# Altium PCB SD171-5.0PCB2.PcbDoc (part 4 of 5)
Units mm, origin at the board's own origin, x right, y up, seen from the top; angles counter-clockwise.
Board outline 152.27 x 99.6 mm, 6 copper layers (Top Layer, InternalPlane1, Mid-Layer 1, Mid-Layer 2, InternalPlane2, Bottom Layer); 325 components, 250 nets, 1794 pads, 490 vias.
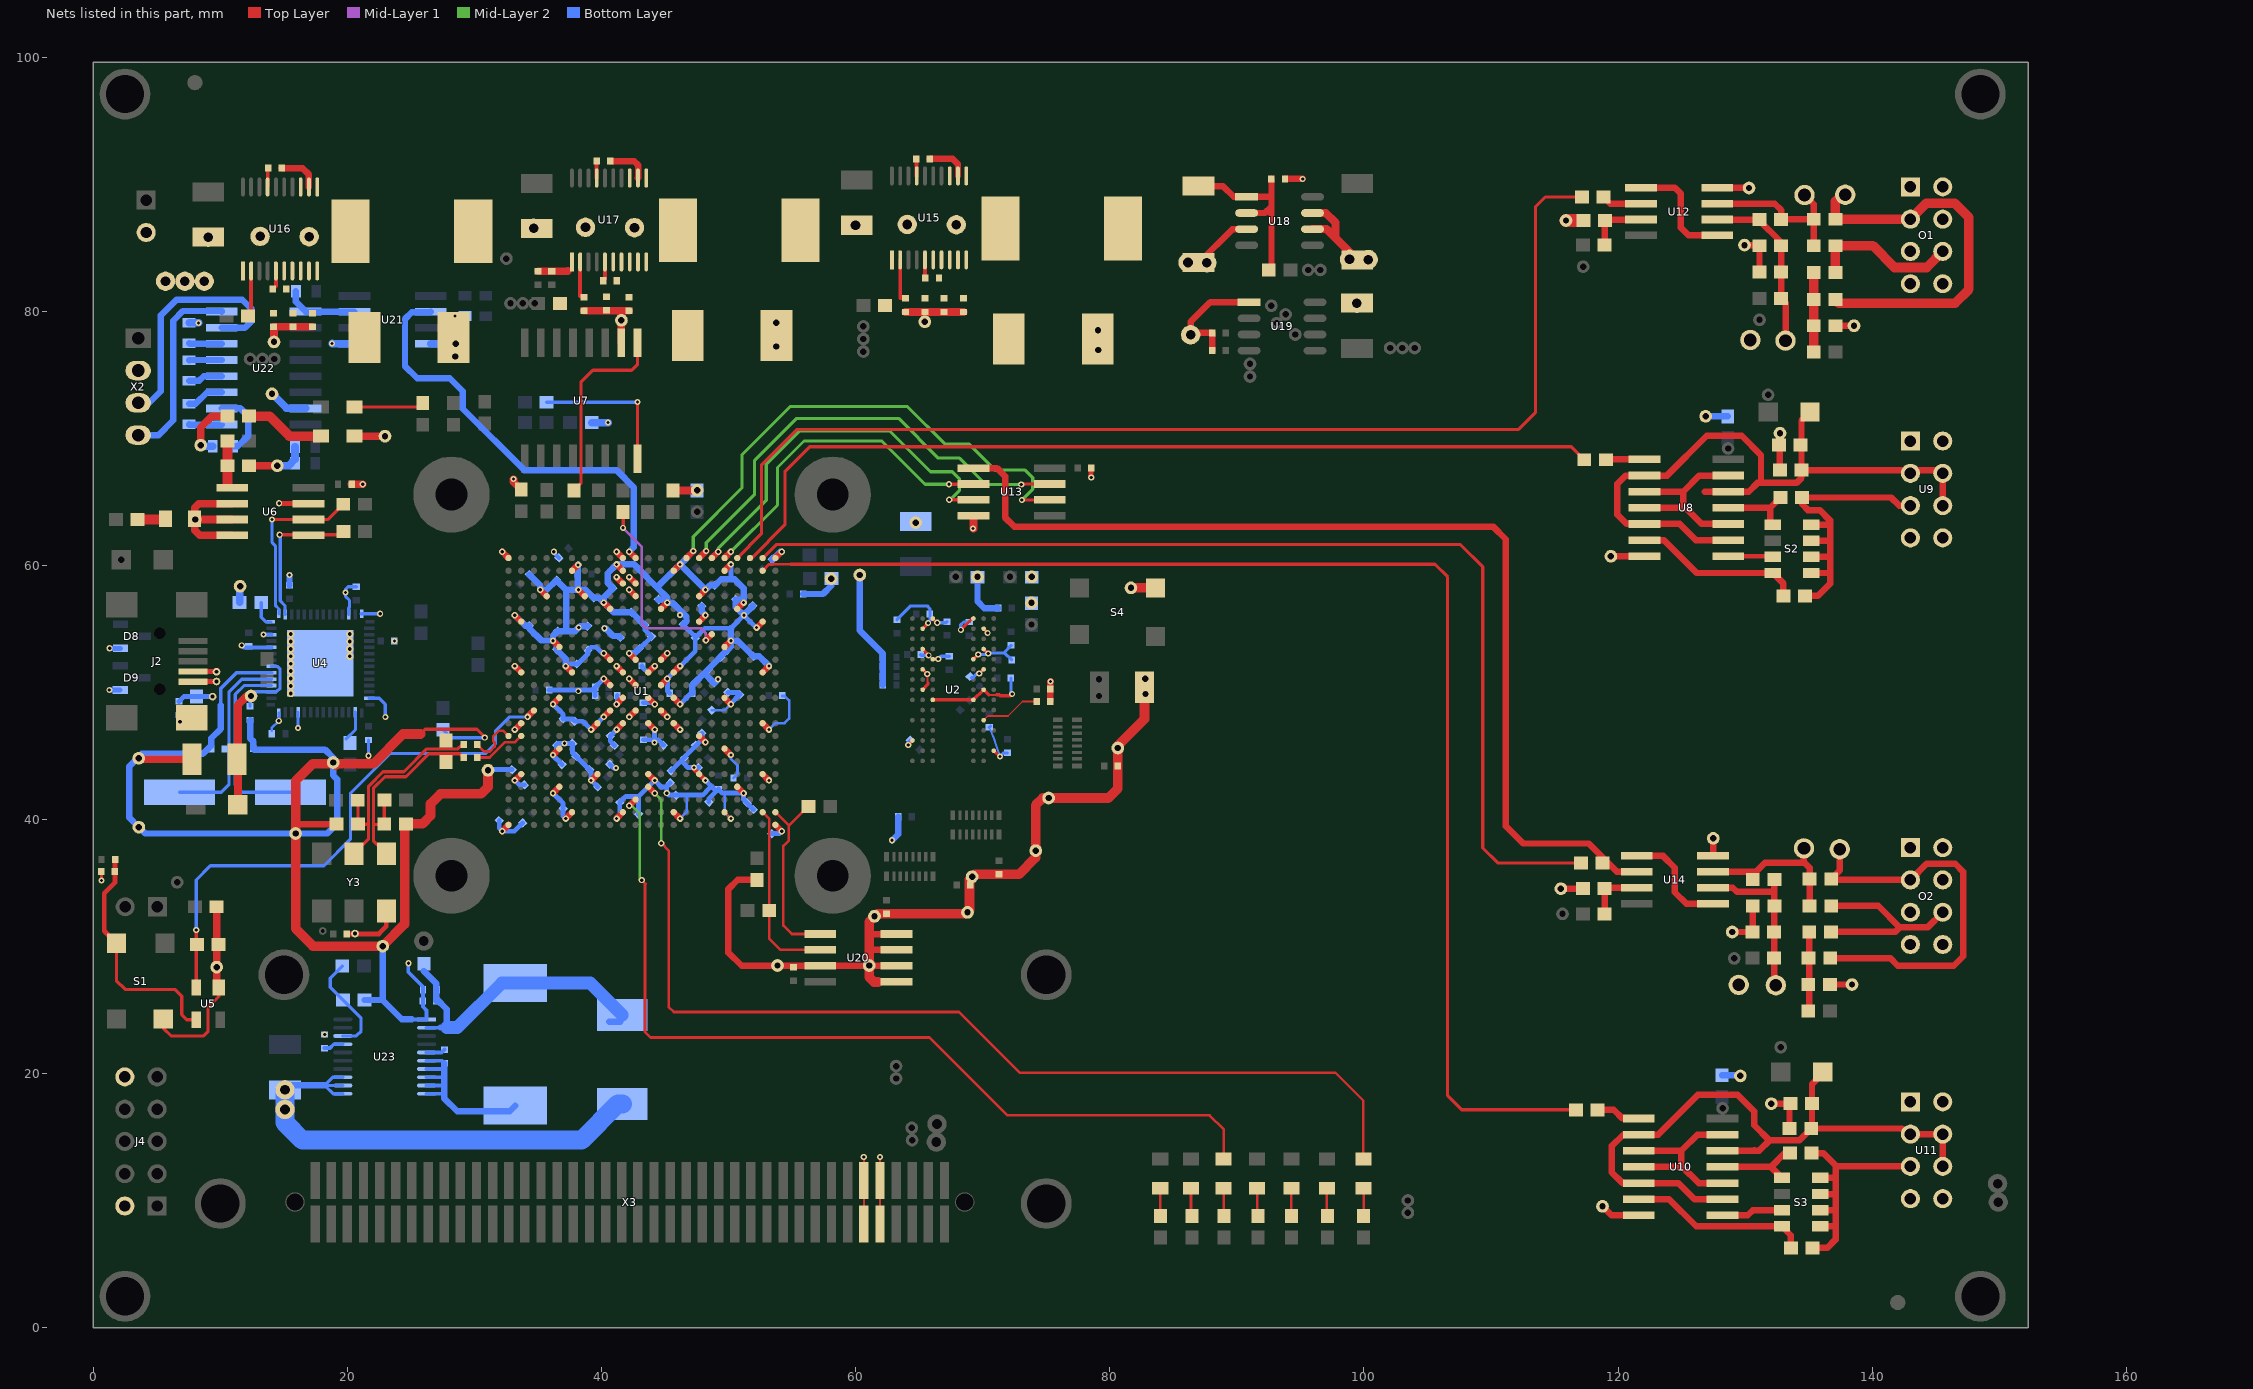
[diagram p8: the nets of this part, all layers, seen from the top]

## Via types
v1: diameter 0.508, hole 0.254, Top Layer to Bottom Layer, 259 vias
v2: diameter 0.483, hole 0.254, Top Layer to Bottom Layer, 230 vias
v3: diameter 0.483, hole 0.254, Top Layer to Bottom Layer, tented top, 1 vias

## Nets (pads, with @x,y where several pads share a name; then routed paths per layer and width w, separated by ;. In a path a pad name is that pad's centre, name@x,y a point inside that pad or via, vN(x,y) a via of type N, cw(c..) or ccw(c..) an arc to the next point about the centre after c; other vN are vias at no path point) (continued)
GND: C43.1 C44.1 C45.2 C46.1 C47.1 C48.1 C49.1 C50.1 C51.1 C52.1 C53.2 C54.1 C58.2 C60.1 C61.1 C63.2 C64.1 C67.2 C68.1 C69.2 C71.2 C72.2 C74.2 C75.2 C76.2 C78.1 C79.1 C80.1 C81.1 C82.1 C83.1 C84.1 C85.1 C86.1 C87.1 C88.1 C89.1 C90.1 C91.1 C92.1 C93.1 C94.1 C95.1 C96.1 C97.1 C98.1 C99.1 C100.1 C101.1 C102.1 C103.1 C104.1 C105.1 C106.1 C107.1 C108.1 C109.1 C110.1 C111.1 C112.1 C113.1 C114.1 C115.1 C116.1 C117.1 C118.1 C119.1 C120.1 C121.1 C122.1 C123.1 C124.1 C125.1 C126.1 C127.1 C128.1 C129.1 C130.1 C131.1 C132.1 C133.1 C134.1 C135.1 C136.1 C137.1 C138.1 C139.1 C140.1 C141.1 C142.1 C143.1 C144.1 C145.1 C146.1 C147.1 C148.1 C149.1 C150.1 C151.1 C152.1 C153.1 C154.1 C155.1 C156.1 C157.1 C158.1 C159.1 C160.1 C161.1 C162.1 C163.1 C165.2 C166.2 C167.1 C168.1 C169.1 C170.1 C171.1 C172.1 C173.1 C174.1 C175.1 C176.1 C177.1 C178.1 C179.1 C180.1 C181.1 C182.1 C183.1 C184.1 C185.1 C186.1 C187.1 C188.1 C189.1 C190.1 C191.1 C192.1 C194.2 C195.2 C196.1 C197.1 C198.1 C199.1 C201.2 C202.2 C203.1 C204.1 C205.1 C206.2 C207.1 C208.2 C209.2 C210.1 C211.2 C212.2 C213.1 C214.2 C215.2 C216.1 C217.1 C218.1 C219.2 C220.2 C221.2 C224.1 C225.1 C226.1 C227.1 C228.1 C229.2 C231.2 C232.1 D7.2 D8.1 D9.1 D11.2 J2.4 J2.5 J4.2 J4.10 O1.1 O1.3 O1.4 O1.5 O1.7 O1.8 O2.1 O2.3 O2.4 O2.5 O2.7 O2.8 pad.0@3.579,44.829 pad.0@3.593,39.409 pad.0@8.034,63.619 pad.0@8.458,69.469 pad.0@9.053,85.837 pad.0@9.398,49.682 pad.0@9.703,50.876 pad.0@9.703,51.638 pad.0@9.715,28.397 pad.0@11.557,58.369 pad.0@14.072,73.508 pad.0@14.224,77.597 pad.0@14.489,67.854 pad.0@15.088,18.745 pad.0@15.545,49.936 pad.0@15.545,50.521 pad.0@15.545,51.105 pad.0@15.545,51.689 pad.0@15.545,52.273 pad.0@15.545,52.857 pad.0@15.545,53.442 pad.0@15.545,54.026 pad.0@15.545,54.61 pad.0@15.926,38.913 pad.0@18.883,44.501 pad.0@20.193,52.857 pad.0@20.193,53.442 pad.0@20.193,54.026 pad.0@20.193,54.61 pad.0@20.599,31.039 pad.0@22.784,30.048 pad.0@22.962,70.18 pad.0@28.499,76.454 pad.0@28.524,77.445 pad.0@31.064,43.891 pad.0@34.656,86.549 pad.0@41.565,79.299 pad.0@47.523,65.926 pad.0@53.746,77.241 pad.0@53.746,79.096 pad.0@53.848,28.527 pad.0@58.064,58.953 pad.0@59.98,86.777 pad.0@60.325,59.258 pad.0@61.062,28.527 pad.0@61.484,32.401 pad.0@64.719,63.373 pad.0@65.44,79.182 pad.0@68.798,32.705 pad.0@69.162,35.507 pad.0@69.583,59.106 pad.0@73.85,59.106 pad.0@73.838,57.061 pad.0@74.168,37.567 pad.0@75.184,41.707 pad.0@79.07,78.511 pad.0@79.096,76.962 pad.0@80.627,45.644 pad.0@81.661,58.242 pad.0@82.779,51.079 pad.0@82.804,49.886 pad.0@115.9,87.147 pad.0@115.494,34.569 pad.0@118.77,9.576 pad.0@119.431,60.731 pad.0@126.886,71.742 pad.0@127.483,38.532 pad.0@128.981,31.166 pad.0@129.489,27 pad.0@129.616,19.837 pad.0@129.946,85.217 pad.0@130.302,89.713 pad.0@130.404,77.749 pad.0@132.055,17.653 pad.0@132.74,70.409 pad.0@138.405,27.026 pad.0@138.557,78.867 pad.1@15.088,17.196 pad.1@16.993,85.877 pad.1@42.596,86.589 pad.1@67.92,86.817 pad.2@13.132,85.903 pad.2@38.735,86.614 pad.2@64.059,86.843 pad.3 pad.4@99.441,80.645 pad.5 pad.6 pad.8 pad.9 pad.10 pad.11 pad.12 R1.1 R8.1 R10.1 R16.2 R18.1 R30.2 R36.2 R39.1 R40.1 R48.1 R52.2 R66.2 R67.2 R71.1 R72.2 R73.1 R86.1 R90.1 R95.1 S1.1 S4.2 U1.A1 U1.A22 U1.AA5 U1.AA9 U1.AA13 U1.AA17 U1.AB1 U1.AB22 U1.B5 U1.B9 U1.B13 U1.B17 U1.D4 U1.D18 U1.E2 U1.E7 U1.E11 U1.E15 U1.E21 U1.G5 U1.G18 U1.H7 U1.J2 U1.J9 U1.J11 U1.J13 U1.J15 U1.J21 U1.K10 U1.K12 U1.K14 U1.L5 U1.L9 U1.L11 U1.L13 U1.L18 U1.M10 U1.M12 U1.M14 U1.N2 U1.N9 U1.N11 U1.N13 U1.N17 U1.N21 U1.P10 U1.P12 U1.P14 U1.R5 U1.R18 U1.U2 U1.U7 U1.U21 U1.V4 U1.V10 U1.V14 U1.W7 U1.W16 U1.W19 U2.A3 U2.A7 U2.B2 U2.B8 U2.D2 U2.D8 U2.E3 U2.E7 U2.F2 U2.F8 U2.H2 U2.H8 U2.J3 U2.J7 U2.N1 U2.P9 U4.6 U4.10 U4.12 U4.26 U4.28 U4.41 U4.53 U4.56 U4.57 U5.1 U6.2 U6.3 U6.4 U6.7 U7.10 U8.7 U9.1 U9.4 U9.5 U9.8 U10.7 U11.1 U11.4 U11.5 U11.8 U12.4 U13.4 U14.4 U15.1 U15.11 U15.12 U15.13 U16.1 U16.11 U16.12 U16.13 U17.1 U17.11 U17.12 U17.13 U18.3 U18.6 U18.7 U19.1 U20.1 U20.2 U20.3 U20.4 U20.7 U21.4 U21.5 U22.15 U23.1 U23.11 U23.12 U23.13 X1.2 X2.2 X3.9 X3.10 X3.11 X3.12 Y3.3 | length 687.1
  Top Layer w0.152: v1@38.137,60.046 v1(38.151,60.046) ; U1.B5@49.68,40.589 v1(50.18,40.089) ; v1@52.18,55.075 v1@52.21,55.105 ; X3.11@60.64,8.191 X3.12@60.64,11.621 v2(60.64,13.449) ; X3.9@61.91,8.191 X3.10@61.91,11.621 61.91,13.234 v2(61.91,13.449) ; v2(65.634,51.46) 65.653,51.441 65.653,50.806 65.684,50.775 ; 70.478,49.817 71.085,49.817
  Top Layer w0.254: v2(0.643,35.222) C58.2@0.643,35.916 ; S1.1@5.512,24.308 5.512,23.597 6.121,22.987 8.687,22.987 9.042,23.343 9.042,25.248 9.881,26.086 9.881,26.645 U5.1@9.881,26.797 ; 25.756,46.736 26.137,47.117 30.201,47.117 30.81,46.507 v2(30.81,46.457) ; C54.1@55.092,28.379 55.214,28.501 U20.7@57.21,28.501 ; v2@64.134,45.898 U2.N1@64.465,46.229 ; U2.H2@65.265,50.229 65.684,50.648 65.684,50.775 ; U2.F2@65.265,51.829 v2(65.634,51.46) ; U2.D2@65.265,53.429 65.761,52.934 v2(65.742,52.934) ; U2.B2@65.265,55.029 v2@65.704,55.467 ; U2.J3@66.065,49.429 U2.J7@69.265,49.429 U2.H8@70.065,50.229 70.478,49.817 ; U2.E3@66.065,52.629 v2@66.497,52.629 ; U2.A3@66.065,55.829 66.395,55.499 v2(66.421,55.499) ; v2(68.275,54.94) 69.164,55.829 U2.A7@69.265,55.829 ; U2.E7@69.265,52.629 69.624,52.988 v2(69.643,52.988) ; v2(69.726,51.508) 69.744,51.508 U2.F8@70.065,51.829 ; U2.D8@70.065,53.429 70.065,53.404 v2@70.387,53.082 ; U2.B8@70.065,55.029 70.386,54.708 v2(70.386,54.689) ; U2.P9@70.865,45.429 71.323,44.971 v2(71.361,44.971) ; 71.085,49.829 71.289,49.829 71.372,49.746 72.174,49.746 v2(72.314,49.886)
  Top Layer w0.305: v2@13.36,54.559 13.365,54.564 v2(13.396,54.564)
  Top Layer w0.381: J2.5@7.849,50.864 9.691,50.864 pad.0@9.703,50.876 ; J2.4@7.849,51.664 9.754,51.664 pad.0@9.779,51.689 ; v2(14.63,64.897) 14.658,64.869 U6.7@16.932,64.869 ; C60.1@19.947,31.014 22.479,31.014 23.063,31.598 Y3.3@23.063,32.817 ; v2(47.269,44.103) 47.269,43.999 U1.E7@47.68,43.589 v1(48.18,43.089) ; C53.2@78.529,67.665 78.529,66.962 78.537,66.954 v2(78.537,66.929)
  Top Layer w0.5: v1(32.18,39.089) U1.A22@32.68,39.589 ; v1(32.18,61.089) U1.AB22@32.68,60.589 ; v1(33.18,43.089) U1.E21@33.68,43.589 ; v1(33.18,47.089) U1.J21@33.68,47.589 ; v1(33.18,52.089) U1.N21@33.68,51.589 ; v1(33.18,56.089) U1.U21@33.68,55.589 ; v1(35.18,58.089) U1.W19@35.68,57.589 ; v1(36.18,42.089) U1.D18@36.68,42.589 ; v1(36.18,45.089) U1.G18@36.68,45.589 ; v1(36.18,49.089) U1.L18@36.68,49.589 ; v1(36.18,54.089) U1.R18@36.68,53.589 ; v1(37.18,40.089) U1.B17@37.68,40.589 ; v1(37.18,52.089) U1.N17@37.68,51.589 ; U1.AA17@37.68,59.589 v1@38.137,60.046 ; v1(38.18,58.089) U1.W16@38.68,57.589 ; v1(39.18,43.089) U1.E15@39.68,43.589 ; v1(39.18,47.089) U1.J15@39.68,47.589 ; v1(40.18,48.089) U1.K14@40.68,48.589 ; v1(40.18,51.089) U1.M14@40.68,50.589 ; v1(40.18,53.089) U1.P14@40.68,52.589 ; v1(40.18,57.089) U1.V14@40.68,56.589 ; v1(41.18,40.089) U1.B13@41.68,40.589 ; v1(41.18,47.089) U1.J13@41.68,47.589 ; v1(41.18,49.089) U1.L13@41.68,49.589 ; v1(41.18,52.089) U1.N13@41.68,51.589 ; v1(41.18,60.089) U1.AA13@41.68,59.589 ; v1(42.18,48.089) U1.K12@42.68,48.589 ; v1(42.18,51.089) U1.M12@42.68,50.589 ; v1(42.18,53.089) U1.P12@42.68,52.589 ; U1.E11@43.68,43.589 v1(44.18,43.089) ; U1.J11@43.68,47.589 v1(44.18,47.089) ; U1.L11@43.68,49.589 v1(44.18,49.089) ; U1.N11@43.68,51.589 v1(44.18,52.089) ; U1.K10@44.68,48.589 v1(45.18,48.089) ; U1.M10@44.68,50.589 v1(45.18,51.089) ; U1.P10@44.68,52.589 v1(45.18,53.089) ; U1.V10@44.68,56.589 v1(45.18,57.089) ; U1.B9@45.68,40.589 v1(46.18,40.089) ; U1.J9@45.68,47.589 v1(46.18,47.089) ; U1.L9@45.68,49.589 v1(46.18,49.089) ; U1.N9@45.68,51.589 v1(46.18,52.089) ; U1.AA9@45.68,59.589 v1(46.18,60.089) ; U1.H7@47.68,46.589 v1(48.18,46.089) ; U1.U7@47.68,55.589 v1(48.18,56.089) ; U1.W7@47.68,57.589 v1(48.18,58.089) ; U1.G5@49.68,45.589 v1(50.18,45.089) ; U1.L5@49.68,49.589 v1(50.18,49.089) ; U1.R5@49.68,53.589 v1(50.18,54.089) ; U1.AA5@49.68,59.589 v1(50.18,60.089) ; U1.D4@50.68,42.589 v1(51.18,42.089) ; U1.V4@50.68,56.589 v1(51.18,57.089) ; v1@52.21,55.105 52.68,55.576 U1.U2@52.68,55.589 ; U1.E2@52.68,43.589 v1(53.18,43.089) ; U1.J2@52.68,47.589 v1(53.18,47.089) ; U1.N2@52.68,51.589 v1(53.18,52.089) ; U1.A1@53.68,39.589 v1(54.18,39.089) ; U1.AB1@53.68,60.589 v1(54.18,61.089) ; pad.0@115.494,34.569 C75.2@117.234,34.569 ; pad.0@118.77,9.576 119.482,8.865 U10.7@121.619,8.865 ; pad.0@119.431,60.731 U8.7@122.072,60.731 ; pad.0@127.457,38.786 127.472,38.771 U14.4@127.472,37.148 ; U12.4@127.803,89.726 pad.0@130.289,89.726 ; pad.0@128.956,31.14 pad.0@128.981,31.166 R8.1@130.569,31.166 130.594,31.191 C76.2@130.594,33.223 ; pad.0@129.946,85.217 131.077,85.217 C71.2@131.127,85.166 R10.1@131.127,83.083 ; pad.0@132.055,17.653 C68.1@133.566,17.653 133.49,17.577 C67.2@133.49,15.697 ; C63.2@132.728,67.513 132.728,70.396 pad.0@132.74,70.409 ; C74.2@136.665,27.026 pad.0@138.405,27.026 ; C69.2@137.096,78.867 pad.0@138.532,78.867
  Top Layer w0.508: C192.1@14.852,91.273 16.473,91.273 16.976,90.771 U16.12@16.976,89.785 ; 15.926,39.649 R16.2@19.139,39.649 ; C199.1@40.673,91.821 42.57,91.821 42.875,91.516 42.875,90.503 U17.12@42.868,90.496 ; R1.1@52.222,35.268 50.711,35.268 49.987,34.544 49.987,29.54 51.026,28.501 U20.7@57.21,28.501 61.062,28.501 U20.2@63.21,28.501 ; 61.062,29.87 61.181,29.751 U20.3@63.21,29.751 ; 61.062,30.988 61.075,31.001 U20.4@63.21,31.001 ; C163.1@65.844,91.999 67.64,91.999 68.05,91.589 U15.12@68.05,90.659 ; R72.2@75.329,49.301 v2(75.329,50.869) v2@75.336,50.876 ; C209.2@86.98,83.856 87.031,83.856 89.647,86.472 U18.3@90.765,86.472 ; C207.1@88.054,76.911 C213.1@88.054,78.308 86.512,78.308 pad.6@86.36,78.156 86.36,79.197 87.884,80.721 U19.1@90.957,80.721 ; C210.1@93.784,90.424 v2(95.174,90.424) ; C208.2@99.466,84.049 C208.2@99.466,84.074
  Top Layer w0.6: pad.0@3.579,44.829 3.654,44.755 C45.2@7.772,44.755 ; pad.0@8.458,69.418 8.458,70.866 9.347,71.755 R40.1@10.554,71.755 ; R48.1@9.715,33.147 9.715,26.81 U5.1@9.881,26.645 ; U6.4@10.932,62.369 8.37,62.369 7.976,62.763 D7.2@7.976,63.678 ; U6.3@10.932,63.619 pad.0@8.034,63.619 D7.2@7.976,63.678 ; U6.2@10.932,64.869 8.303,64.869 7.976,64.541 D7.2@7.976,63.678 ; R36.2@12.27,67.854 pad.0@14.489,67.854 pad.0@14.503,67.869 ; pad.0@14.224,77.597 14.224,78.758 C196.1@14.199,78.783 C198.1@17.247,78.783 ; C61.1@20.328,66.396 v2(21.209,66.396) ; D11.2@20.549,70.18 pad.0@22.962,70.18 pad.0@22.987,70.206 ; v2(33.071,66.802) 33.071,66.586 R52.2@33.68,65.977 ; C191.1@35.016,83.17 C190.1@36.08,83.17 37.323,83.17 37.338,83.185 ; C203.1@38.608,80.053 41.554,80.053 ; U7.10@41.565,77.538 41.565,80.042 41.554,80.053 ; C205.1@42.164,80.053 41.554,80.053 ; R67.2@45.618,65.9 47.498,65.9 pad.0@47.523,65.926 ; C167.1@63.916,79.952 C168.1@65.44,79.952 ; pad.0@65.44,79.182 C168.1@65.44,79.952 ; C170.1@68.488,79.952 C169.1@66.964,79.952 C168.1@65.44,79.952 ; v2(69.24,62.916) 69.276,62.88 U13.4@69.276,63.919
  Top Layer w0.635: U18.6@95.953,86.472 97.043,86.472 97.754,85.761 ; U18.7@95.953,87.742 96.992,87.742 97.754,86.98 97.754,85.761 ; C208.2@99.466,84.049 99.441,84.074 97.754,85.761
  Top Layer w0.762: pad.0@19.094,44.291 pad.0@19.202,44.399 ; 25.756,46.736 24.384,46.736 22.047,44.399 pad.0@19.202,44.399 ; pad.0@31.064,43.891 31.064,42.57 30.531,42.037 27.33,42.037 26.543,41.25 26.543,40.31 25.908,39.675 R18.1@24.6,39.675 24.511,39.586 24.511,31.775 pad.0@22.784,30.048 17.297,30.048 15.926,31.42 pad.0@15.926,38.913 15.926,39.649 15.926,43.053 17.272,44.399 pad.0@19.202,44.399 ; 61.773,27.229 61.443,27.229 61.062,27.61 61.062,28.501 61.062,29.87 61.062,30.988 61.062,31.953 61.714,32.606 C80.1@62.434,32.606 68.699,32.606 68.961,32.868 68.961,35.306 69.36,35.705 C82.1@71.273,35.705 72.865,35.705 74.168,37.008 74.168,41.148 74.727,41.707 79.883,41.707 80.627,42.451 C81.1@80.627,44.222 80.627,45.829 82.728,47.93 C212.2@82.728,50.419 ; pad.0@81.661,58.242 S4.2@83.591,58.242
  Top Layer w1: pad.0@115.9,87.147 C72.2@117.259,87.147
  Mid-Layer 1 w0.254: v2(30.81,46.457) v2@30.836,46.482 ; v2(65.742,52.934) v2@65.742,52.952 ; v2(69.643,52.988) v2@69.701,52.988
  Bottom Layer w0.152: v2(23.705,54.069) C51.1@23.706,54.076 ; C218.1@70.51,47.262 70.891,46.38 71.091,45.78 v2(71.361,44.971)
  Bottom Layer w0.203: C49.1@14.039,46.99 14.039,47.211 v2(14.605,47.777) 14.617,47.789 U4.56@14.617,48.409 ; v2(16.116,47.207) 16.129,47.22 16.129,47.244 16.116,47.257 U4.53@16.117,48.459 ; C149.1@45.867,41.93 C149.1@46.133,41.93 ; v1(46.18,40.089) 46.697,40.606 46.697,41.866 ; C146.1@48.672,48.621 49.712,48.621 v1(50.18,49.089) ; 49.521,42.089 49.697,41.912 49.697,40.889 ; 49.708,40.879 49.708,40.513 v1@50.132,40.089 ; v1(50.18,45.089) 50.18,44.791 50.697,44.273 50.697,43.594 C161.1@50.386,43.282 ; v1(53.18,47.089) 53.691,47.6 54.407,47.6 54.762,47.955 54.762,49.378 54.407,49.733 C157.1@54.237,49.733
  Bottom Layer w0.254: U23.11@19.638,18.432 18.88,18.432 18.23,19.082 ; U23.12@19.638,19.082 18.23,19.082 ; U23.13@19.638,19.732 18.843,19.732 18.212,19.101 18.23,19.082 ; U4.26@20.117,56.159 20.117,56.668 20.168,56.719 20.168,57.251 19.863,57.556 v2(19.863,57.887) 19.863,58.141 20.048,58.326 C47.1@20.701,58.326 ; v2(21.666,45.034) C48.1@21.666,46.271 ; U4.41@21.717,49.559 22.5,49.559 22.987,49.073 v2(22.987,48.082) ; R90.1@27.534,47.079 28.156,46.457 v2(30.81,46.457) ; C96.1@63.246,55.735 64.331,56.82 65.634,56.82 65.844,56.609 C101.1@65.844,56.184 65.844,55.627 v2(65.704,55.486) ; v2(64.135,45.872) 64.135,46.112 C91.1@64.282,46.259 ; C97.1@65.108,52.984 65.158,52.934 v2(65.742,52.934) ; v2(66.421,55.499) 67.1,55.499 C98.1@67.183,55.583 ; v2(66.497,52.654) 66.708,52.865 C99.1@67.361,52.865 ; v2(68.275,54.94) 68.275,55.347 68.486,55.557 C103.1@68.936,55.557 ; C92.1@69.108,51.161 69.221,51.161 69.647,51.587 v2(69.726,51.508) ; v2(69.643,52.988) 70.336,52.988 v2(70.431,53.082) 70.459,53.111 71.635,53.111 ; C218.1@70.51,47.262 C218.1@70.619,47.371 ; v2(71.361,44.971) 71.645,45.255 C102.1@71.932,45.255 ; v2@72.22,49.98 C104.1@72.22,51.155 ; C94.1@72.237,53.713 71.635,53.111 ; C93.1@72.271,52.578 71.737,53.111 71.635,53.111
  Bottom Layer w0.3: 22.758,25.806 22.784,25.806 ; v2(24.816,28.702) 24.79,28.702 24.79,28.016 25.951,26.855 25.951,26.06 ; 25.07,24.282 U23.1@26.238,24.282 26.238,24.994 25.951,25.281 25.951,26.06 ; C227.1@25.951,26.62 25.951,26.06 ; v2(36.246,61.087) 36.195,61.036 36.21,61.036 C120.1@36.646,60.599
  Bottom Layer w0.305: 10.033,49.022 10.033,50.317 11.275,51.559 U4.6@14.017,51.559 ; v2(11.684,53.721) 11.709,53.721 11.871,53.559 U4.10@14.017,53.559 ; v2(13.396,54.564) 13.391,54.559 U4.12@14.017,54.559 ; U4.28@21.117,56.209 v2@22.58,56.209
  Bottom Layer w0.381: v2(1.27,50.216) 1.28,50.206 D9.1@2.123,50.206 ; v2(1.295,53.492) 1.306,53.482 D8.1@2.148,53.482 ; C219.2@6.756,49.306 7.132,49.682 pad.0@9.398,49.682 ; pad.0@31.064,43.891 31.11,43.937 C133.1@32.963,43.937 ; C142.1@31.947,39.924 31.947,39.321 v1(32.18,39.089) 33.145,39.089 C143.1@33.802,39.746 ; v1(33.18,43.089) 33.526,42.743 C134.1@33.929,42.743 ; C129.1@35.872,50.215 v2@38.176,50.215 ; v1(36.18,42.089) 36.977,41.292 C141.1@36.977,40.863 36.977,40.292 v1(37.18,40.089) ; v1(36.18,49.089) 36.977,48.292 C130.1@36.977,47.925 37.713,47.925 C132.1@37.891,47.747 38.522,47.747 v1(39.18,47.089) v1(40.18,48.089) ; C140.1@36.901,44.329 36.18,45.05 v1(36.18,45.089) 36.454,45.363 C131.1@36.454,45.867 36.595,46.008 v2@37.211,46.008 ; v2(37.084,46.008) v2@37.211,46.008 ; v1(37.18,52.089) 37.333,52.241 38.108,52.241 38.933,53.067 C174.1@38.933,53.32 39.181,53.569 39.599,53.569 40.078,53.089 v1(40.18,53.089) ; v2(38.176,50.114) v2@38.176,50.215 ; C183.1@39.489,49.759 C176.1@39.489,50.419 ; C139.1@39.687,42.572 39.687,42.582 v1(39.18,43.089) 39.18,43.792 37.726,45.246 C189.1@37.726,46.008 v2@37.211,46.008 ; v1(40.18,51.089) 40.159,51.089 C176.1@39.489,50.419 ; C138.1@40.647,44.357 40.96,44.044 41.148,44.044 v2(41.148,44.069) ; C182.1@41.015,45.842 40.691,46.166 40.691,46.574 C136.1@40.698,46.582 41.18,47.063 v1(41.18,47.089) ; v1(41.18,40.089) 41.433,40.342 C144.1@41.433,41.356 41.906,41.83 42.921,41.83 ; v1(41.18,49.089) 41.242,49.151 C178.1@41.242,49.784 ; C150.1@42.921,40.443 42.921,41.83 ; C173.1@42.972,53.473 43.022,53.473 C125.1@43.95,54.4 43.414,54.936 C118.1@43.414,55.301 ; C175.1@43.193,52.116 43.163,52.086 43.163,52.036 43.485,51.714 43.806,51.714 v1(44.18,52.089) ; C179.1@43.282,49.207 44.061,49.207 v1(44.18,49.089) ; C184.1@43.307,46.297 44.036,46.297 ; v2(44.171,46.082) 44.18,46.092 v2@44.18,46.297 ; v1(44.18,47.089) 44.18,46.441 ; C186.1@44.876,45.867 44.447,46.297 v2@44.18,46.297 ; C180.1@45.359,49.949 45.18,50.129 v1(45.18,51.089) v1(46.18,52.089) 46.196,52.089 47.377,53.27 C187.1@47.377,54.31 ; C148.1@45.395,42.895 45.07,42.57 ; C147.1@45.471,43.86 47.899,46.288 C158.1@47.899,46.807 ; v1(46.18,49.089) 46.193,49.089 47.04,49.936 C181.1@47.125,49.936 ; C124.1@46.412,55.352 47.377,54.387 C187.1@47.377,54.31 48.133,55.067 50.19,55.067 v2(51.206,56.083) 52.172,55.118 v1(52.197,55.118) ; 46.431,44.475 46.804,44.103 v2(47.269,44.103) C159.1@47.632,44.103 ; v1(48.18,43.089) 48.649,42.62 ; 48.201,42.172 47.96,41.93 C149.1@45.867,41.93 45.293,41.93 v2(45.136,42.088) 45.136,42.505 45.07,42.57 ; 48.214,42.185 48.649,42.62 ; C217.1@48.444,41.382 48.444,41.654 C162.1@49.199,42.41 49.521,42.089 v1(51.18,42.089) 51.18,41.571 C160.1@51.95,40.801 ; 48.858,42.41 48.649,42.62 ; C156.1@49.942,50.018 50.733,50.018 C87.1@50.896,49.855 50.18,49.139 v1(50.18,49.089) ; 50.165,58.928 50.18,58.943 v1(50.18,60.089) ; C78.1@53.396,38.907 53.998,38.907 v1(54.18,39.089) ; v2@38.176,50.215 39.285,50.215 C176.1@39.489,50.419 ; 42.921,41.83 v1(44.18,43.089) 44.698,42.57 45.07,42.57 ; 44.036,46.297 v2@44.18,46.297 ; 44.036,46.297 44.18,46.441 ; v2@44.18,46.297 44.18,46.441
  Bottom Layer w0.5: pad.0@15.088,18.745 15.443,19.101 18.212,19.101 ; C52.1@15.444,58.453 v2(15.443,59.258) ; R95.1@21.349,25.806 22.758,25.806 22.784,25.781 ; pad.0@22.784,30.048 22.784,25.806 22.784,25.781 ; 25.07,24.282 24.282,24.282 22.784,25.781 ; v2(62.865,38.379) 63.34,38.854 R73.1@63.34,40.234 ; C88.1@69.583,59.08 69.583,57.188 70.129,56.642 C95.1@71.214,56.642 ; pad.0@126.886,71.742 C214.2@128.626,71.742 ; C215.2@128.168,19.888 pad.0@129.591,19.888
  Bottom Layer w0.508: 10.033,49.022 10.033,47.142 9.289,46.398 9.289,45.839 8.636,45.187 3.835,45.187 2.819,44.171 2.819,40.183 pad.0@3.593,39.409 4.089,38.913 pad.0@15.926,38.913 18.415,38.913 19.202,39.7 19.202,43.166 18.883,43.485 pad.0@18.883,44.501 18.883,44.871 18.237,45.517 12.682,45.517 C43.1@12.606,45.593 12.606,46.152 12.344,46.414 C46.1@12.344,47.846 ; v1(33.18,56.089) 33.993,55.276 C113.1@34.321,55.276 34.321,55.05 35.269,54.102 36.167,54.102 v1(36.18,54.089) ; C107.1@34.321,59.289 35.18,58.43 v1(35.18,58.089) 35.697,58.089 C106.1@36.454,58.846 37.211,58.089 ; v1(37.18,52.089) 37.18,52.671 C115.1@36.467,53.384 36.467,53.801 v1(36.18,54.089) ; v1(38.151,60.046) 38.143,60.038 C110.1@38.143,59.335 38.143,58.126 v1(38.18,58.089) ; C172.1@38.908,55.225 38.309,55.225 v2(38.202,55.118) 37.916,54.833 37.186,54.833 ; v2(40.234,55.067) 40.259,55.042 40.348,55.042 40.354,55.036 40.354,55.016 40.917,54.454 41.34,54.454 C177.1@41.459,54.336 ; v1(42.18,53.089) 42.588,53.089 C173.1@42.972,53.473 ; C118.1@43.414,55.301 43.389,55.301 C117.1@42.373,56.317 42.369,56.321 40.948,56.321 v1(40.18,57.089) ; C114.1@44.468,57.321 44.948,57.321 ; v2(46.177,56.109) 46.324,56.256 46.324,56.332 ; C124.1@46.412,55.352 46.685,55.625 46.685,55.971 46.324,56.332 ; C119.1@46.688,60.582 v1@46.194,60.089 ; C181.1@47.125,49.936 47.125,50.569 C188.1@47.389,50.833 48.077,51.522 ; C121.1@47.886,56.803 47.886,56.383 v1(48.18,56.089) ; v2(49.174,51.054) 48.875,50.754 C83.1@48.85,50.754 48.083,51.522 48.077,51.522 ; 50.19,55.067 50.18,55.057 v1(50.18,54.089) ; C152.1@51.912,56.84 51.206,56.135 v2(51.206,56.083) 50.564,56.725 C153.1@50.564,57.321 50.948,57.321 v1(51.18,57.089) 51.18,58.218 50.47,58.928 50.165,58.928 49.418,58.928 C122.1@48.941,58.451 48.542,58.451 v1(48.18,58.089) 46.194,60.075 v1@46.194,60.089 ; v1(53.18,52.089) 52.403,52.866 C154.1@51.95,52.866 50.727,54.089 v1(50.18,54.089) ; C126.1@53.422,60.457 54.054,61.089 v1(54.18,61.089) ; C84.1@55.862,57.759 57.429,57.759 58.088,58.418 R66.2@58.088,58.979 ; pad.0@60.325,59.258 60.325,54.889 62.146,53.068 C86.1@62.146,52.756 C85.1@62.146,52.045 C100.1@62.146,51.258 C90.1@62.146,50.597 ; v1(36.18,54.089) 36.18,54.483 C108.1@36.53,54.833 37.186,54.833 ; 37.186,54.833 37.211,54.859 37.211,58.089 ; 37.211,58.089 v1(38.18,58.089) ; v1(38.18,58.089) 38.747,58.089 C109.1@39.388,57.448 39.821,57.448 v1(40.18,57.089) ; v1(40.18,57.089) 40.18,57.489 C111.1@40.902,58.21 40.488,58.624 40.488,59.396 v1(41.18,60.089) 42.568,60.089 C112.1@42.933,59.724 44.394,58.262 ; 44.394,58.262 45.18,57.477 v1(45.18,57.089) 45.568,57.089 C123.1@45.854,56.803 46.324,56.332 ; 44.394,58.262 44.394,58.303 v1(46.18,60.089) v1@46.194,60.089 ; 48.077,51.522 50.18,53.624 v1(50.18,54.089)
  Bottom Layer w0.6: C226.1@7.544,79.096 v2(8.28,79.096) ; pad.0@8.458,69.469 8.534,69.393 C225.1@9.398,69.393 ; R30.2@11.519,57.099 pad.0@11.519,58.433 ; pad.0@14.072,73.584 pad.0@14.072,73.508 15.215,72.365 U22.15@16.713,72.365 ; pad.0@14.489,67.854 15.378,67.854 15.875,68.352 C221.2@15.875,69.342 ; v2(18.796,77.47) 18.809,77.457 U21.5@20.558,77.457 ; U21.4@26.558,77.457 28.512,77.457 28.499,77.444 pad.0@28.499,76.454 ; v2(28.473,79.629) 28.473,79.604 29.235,79.604 C220.2@29.261,79.629 ; C105.1@39.23,71.247 v2(40.513,71.247)
  Bottom Layer w1.5: pad.0@15.088,18.745 15.088,16.154 16.459,14.783 38.43,14.783 41.28,17.633 C229.2@41.631,17.633
  other v2: 18.212,23.096 22.581,56.21
MCLKIN: C56.2 U1.H21 | length 4.2
  Top Layer w0.203: C56.2@30.218,44.893 31.202,44.893 32.41,46.101 33.192,46.101 U1.H21@33.68,46.589
MCLKIN/: C55.2 U1.H22 | length 4.2
  Top Layer w0.203: C55.2@30.218,45.909 30.763,45.364 31.207,45.364 31.593,45.75 31.593,46.08 31.471,46.203 31.471,46.558 31.9,46.988 32.281,46.988 U1.H22@32.68,46.589
MGT_REFCLK0N: U1.W12 | length 0.7
  Top Layer w0.5: v1(42.18,58.089) U1.W12@42.68,57.589
MGT_REFCLK0P: U1.Y12 | length 0.7
  Top Layer w0.5: v1(42.18,59.089) U1.Y12@42.68,58.589
MGT_REFCLK1N: U1.Y13 | length 0.7
  Top Layer w0.5: v1(41.18,59.089) U1.Y13@41.68,58.589
MGT_REFCLK1P: U1.AB13 | length 0.7
  Top Layer w0.5: v1(41.18,61.089) U1.AB13@41.68,60.589
NetC43_2: C43.2 U4.4 Y2.2 | length 14.8
  Bottom Layer w0.254: U4.4@14.017,50.559 11.875,50.559 11.176,49.86 11.176,42.723 11.735,42.164 Y2.2@15.507,42.164
NetC44_2: C44.2 U4.5 Y2.1 | length 15.2
  Bottom Layer w0.254: Y2.1@6.807,42.164 10.084,42.164 10.693,42.774 10.693,50.063 11.689,51.059 U4.5@14.017,51.059
NetC45_1: C45.1 C46.2 L2.1 pad.0@12.421,49.733 U4.3 U4.7 | length 14.9
  Top Layer w0.635: L2.1@11.379,41.173 11.379,49.022 12.09,49.733 pad.0@12.421,49.733
  Bottom Layer w0.254: C46.2@12.344,48.913 12.344,49.657 pad.0@12.421,49.733 12.747,50.059 U4.3@14.017,50.059 ; U4.3@14.013,50.063 U4.3@14.017,50.059 ; U4.7@14.017,52.059 14.489,52.059 14.707,51.841 14.707,50.35 14.416,50.059 U4.3@14.017,50.059
NetC55_1: C55.1 R15.1 R16.1 R32.2 Y3.5 | length 17.7
  Top Layer w0.254: Y3.5@20.523,37.317 21.654,38.448 21.654,39.649 ; R15.1@20.841,41.656 R16.1@20.841,39.649 21.654,39.649 ; 28.854,45.72 C55.1@29.043,45.909 ; C55.1@29.152,45.909 C55.1@29.043,45.909 ; 21.654,39.649 21.654,41.986 21.666,41.998 21.666,42.627 22.804,43.764 24.455,43.764 26.258,45.568 28.702,45.568 C55.1@29.043,45.909
NetC56_1: C56.1 R17.2 R18.2 R32.1 Y3.4 | length 16.8
  Top Layer w0.254: R17.2@22.898,41.631 22.898,39.649 22.873,39.624 22.047,39.624 ; Y3.4@23.063,37.317 22.047,38.333 22.047,39.624 ; C56.1@29.152,44.893 29.086,44.958 28.858,45.187 26.416,45.187 24.613,43.383 22.962,43.383 22.047,42.469 22.047,39.624
NetC58_1: C58.1 C59.2 S1.2 U5.3 | length 18.7
  Top Layer w0.254: S1.2@1.829,30.277 1.829,27.33 2.515,26.645 6.426,26.645 6.96,26.111 6.96,24.663 7.366,24.257 U5.3@8.103,24.257
  Top Layer w0.381: C59.2@1.72,36.88 1.72,35.07 0.864,34.214 0.864,31.242 S1.2@1.829,30.277
NetC62_1: C62.1 C65.1 S2.5 S2.6 S2.7 S2.8 U9.3 | length 25.5
  Top Layer w0.508: C65.1@134.709,57.607 135.712,57.607 136.677,58.572 136.677,59.385 ; S2.5@135.179,59.411 136.652,59.411 136.677,59.385 ; S2.6@135.179,60.681 136.576,60.681 136.677,60.579 ; S2.7@135.179,61.951 136.601,61.951 136.677,61.874 ; S2.8@135.179,63.221 136.525,63.221 136.677,63.068 ; U9.3@143.003,64.717 142.115,64.717 141.478,65.354 C62.1@134.48,65.354 134.48,64.821 134.938,64.364 135.865,64.364 136.677,63.551 136.677,63.068 ; 136.677,59.385 136.677,60.579 ; 136.677,60.579 136.677,61.874 ; 136.677,61.874 136.677,63.068
NetC62_2: C62.2 S2.1 U8.11 | length 5.9
  Top Layer w0.508: U8.11@128.672,64.541 131.966,64.541 ; S2.1@132.182,63.221 131.966,63.436 131.966,64.541 ; C62.2@132.779,65.354 131.966,64.541
NetC63_1: C63.1 C64.2 L4.2 U8.2 U8.5 U8.9 U8.12 U9.2 U9.6 U9.7 | length 55
  Top Layer w0.508: 126.822,65.811 U8.12@128.672,65.811 130.277,65.811 130.962,66.497 131.242,66.497 ; U8.9@128.672,62.001 126.111,62.001 124.841,63.271 U8.5@122.072,63.271 120.675,63.271 119.939,64.008 119.939,66.421 120.599,67.081 U8.2@122.072,67.081 123.85,67.081 126.975,70.206 129.718,70.206 131.242,68.682 131.242,66.497 ; L4.2@135.103,72.085 134.429,71.412 C63.1@134.429,67.513 ; U9.6@145.543,64.717 U9.7@145.543,67.257 145.287,67.513 C63.1@134.429,67.513 ; 131.242,66.497 134.036,66.497 134.429,66.891 C63.1@134.429,67.513
NetC65_2: C65.2 S2.4 U8.6 | length 13.3
  Top Layer w0.508: U8.6@122.072,62.001 123.596,62.001 126.187,59.411 S2.4@132.182,59.411 133.007,58.585 C65.2@133.007,57.607
NetC66_1: C66.1 C70.1 S3.5 S3.6 S3.7 S3.8 U11.3 | length 21.1
  Top Layer w0.508: C66.1@135.217,13.767 136.144,13.767 137.109,12.802 ; C70.1@135.293,6.299 136.449,6.299 137.109,6.96 137.109,8.077 ; S3.5@135.89,8.001 137.033,8.001 137.109,8.077 ; S3.6@135.89,9.271 137.084,9.271 137.109,9.296 ; S3.7@135.89,10.541 137.058,10.541 137.109,10.592 ; S3.8@135.89,11.811 137.109,11.811 ; U11.3@143.003,12.717 137.194,12.717 137.109,12.802 ; 137.109,8.077 137.109,9.296 ; 137.109,9.296 137.109,10.592 ; 137.109,10.592 137.109,11.811 ; 137.109,11.811 137.109,12.802
NetC66_2: C66.2 S3.1 U10.11 | length 7
  Top Layer w0.508: U10.11@128.219,12.675 132.029,12.675 ; S3.1@132.893,11.811 132.029,12.675 ; C66.2@133.515,13.767 133.121,13.767 132.029,12.675
NetC67_1: C67.1 C68.2 L5.2 U10.2 U10.5 U10.9 U10.12 U11.2 U11.6 U11.7 | length 53.6
  Top Layer w0.508: U10.9@128.219,10.135 126.009,10.135 124.739,11.405 U10.5@121.619,11.405 120.345,11.405 119.507,12.243 119.507,14.326 120.396,15.215 U10.2@121.619,15.215 123.139,15.215 126.263,18.339 129.413,18.339 130.708,17.043 130.708,15.951 131.902,14.757 ; U10.12@128.219,13.945 130.708,13.945 ; 130.708,13.97 130.734,13.945 131.089,13.945 131.902,14.757 ; L5.2@136.093,20.142 136.093,20.015 135.255,19.177 135.255,15.761 C67.1@135.191,15.697 ; U11.6@145.543,12.717 U11.7@145.543,15.257 ; U11.7@145.543,15.442 U11.7@145.543,15.257 ; 131.902,14.757 134.252,14.757 C67.1@135.191,15.697 ; C67.1@135.191,15.697 142.316,15.697 142.756,15.257 U11.2@143.003,15.257 U11.7@145.543,15.257
NetC69_1: C69.1 R12.1 R55.2 R56.1 | length 6.2
  Top Layer w0.762: R55.2@135.395,76.81 R56.1@135.395,83.058
NetC70_2: C70.2 S3.4 U10.6 | length 14.1
  Top Layer w0.508: U10.6@121.619,10.135 124.003,10.135 126.136,8.001 S3.4@132.893,8.001 133.591,7.302 C70.2@133.591,6.299
NetC71_1: C71.1 pad.0@133.172,77.699 R9.1 R10.2 R60.1 U12.2 | length 13.6
  Top Layer w0.508: U12.2@127.803,87.226 131.036,87.226 132.829,85.433 C71.1@132.829,85.166 R9.1@132.829,81.026 133.172,80.683 pad.0@133.172,77.699
NetC72_1: C72.1 R57.1 U12.7 | length 4.8
  Top Layer w0.508: R57.1@118.935,85.217 118.961,85.242 C72.1@118.961,87.147 119.04,87.226 U12.7@121.803,87.226
NetC73_1: C73.1 pad.0@134.671,89.154 R11.1 R60.2 U12.3 | length 12.8
  Top Layer w0.508: U12.3@127.803,88.476 132.326,88.476 132.829,87.973 R60.2@132.829,87.224 132.855,87.249 C73.1@135.395,87.249 ; pad.0@134.671,89.154 135.395,88.43 C73.1@135.395,87.249 ; R11.1@135.395,85.166 C73.1@135.395,87.249
NetC73_2: C73.2 O1.2 pad.0@137.871,89.179 R12.2 | length 30.3
  Top Layer w0.762: R12.2@137.096,80.924 137.381,80.64 146.502,80.64 147.599,81.737 147.599,87.401 146.486,88.515 144.261,88.515 O1.2@143.003,87.257 137.105,87.257 C73.2@137.096,87.249 137.096,88.659 pad.0@137.592,89.154
NetC74_1: C74.1 R5.1 R61.2 R62.1 | length 6.3
  Top Layer w0.508: R61.2@134.963,24.943 135.039,25.019 R62.1@135.039,31.166
NetC75_1: C75.1 R63.1 U14.7 | length 4.6
  Top Layer w0.508: R63.1@118.935,32.563 C75.1@118.935,34.569 119.014,34.648 U14.7@121.472,34.648
NetC76_1: C76.1 pad.0@132.41,26.975 R7.1 R8.2 R65.1 U14.2 | length 13.3
  Top Layer w0.508: U14.2@127.472,34.648 129.03,34.648 129.362,34.315 132.283,34.315 ; R65.1@132.296,35.306 132.296,29.134 R7.1@132.27,29.108 132.27,27.114 pad.0@132.41,26.975
NetC77_1: C77.1 pad.0@134.62,37.744 R6.2 R65.2 U14.3 | length 12.2
  Top Layer w0.508: U14.3@127.472,35.898 130.843,35.898 131.572,36.627 134.645,36.627 ; pad.0@134.62,37.744 134.62,36.652 134.645,36.627 ; R6.2@135.064,33.223 C77.1@135.064,35.331 135.064,36.208 134.645,36.627
NetC77_2: C77.2 O2.2 pad.0@137.439,37.668 R5.2 | length 31.5
  Top Layer w0.508: R5.2@136.69,29.108 141.402,29.108 142.011,28.499 146.406,28.499 147.168,29.261 147.168,35.89 146.533,36.525 144.271,36.525 O2.2@143.003,35.257 136.841,35.257 C77.2@136.766,35.331 137.439,36.005 pad.0@137.439,37.668
NetC163_2: C163.2 U15.17 | length 1.4
  Top Layer w0.305: U15.17@64.8,90.659 C163.2@64.8,92.098
NetC164_1: C164.1 L6.2 U15.6 U15.7 U15.8 U15.9 U15.10
NetC164_2: C164.2 U15.5 | length 1.4
  Top Layer w0.3: U15.5@65.45,84.059 65.45,82.665 C164.2@65.489,82.627
NetC166_1: C166.1 C167.2 C168.2 C169.2 C170.2 L6.1 R75.1 U15.2 | length 3.1
  Top Layer w0.3: U15.2@63.5,84.059 63.5,81.102 63.576,81.026
NetC192_2: C192.2 U16.17 | length 1.5
  Top Layer w0.254: U16.17@13.726,89.785 13.726,91.214 C192.2@13.785,91.273
NetC193_1: C193.1 L7.2 U16.6 U16.7 U16.8 U16.9 U16.10
NetC193_2: C193.2 U16.5 | length 1.5
  Top Layer w0.3: C193.2@14.141,81.748 14.376,81.984 U16.5@14.376,83.185
NetC195_1: C195.1 C196.2 C197.2 C198.2 L7.1 R76.1 U16.2 | length 3.6
  Top Layer w0.3: R76.1@12.19,79.64 12.426,79.876 U16.2@12.426,83.185
NetC199_2: C199.2 U17.17 | length 1.4
  Top Layer w0.305: U17.17@39.618,90.496 C199.2@39.618,91.91
NetC200_1: C200.1 L8.2 U17.6 U17.7 U17.8 U17.9 U17.10
NetC200_2: C200.2 U17.5 | length 1.5
  Top Layer w0.3: C200.2@40.125,82.409 40.268,82.552 U17.5@40.268,83.896
NetC202_1: C202.1 C203.2 C204.2 C205.2 L8.1 R77.1 U17.2 | length 2.7
  Top Layer w0.3: 38.303,81.204 38.318,81.219 U17.2@38.318,83.896
NetC209_1: C209.1 C210.2 R78.2 U18.1 U18.2 | length 15.5
  Top Layer w0.5: C209.1@86.98,89.856 88.909,89.856 89.753,89.012 U18.1@90.765,89.012 92.678,89.012 92.718,89.052 ; U18.2@90.765,87.742 92.213,87.742 92.718,88.247 ; R78.2@92.505,83.247 92.718,83.459 92.718,88.247 ; C210.2@92.718,90.424 92.718,89.052 ; 92.718,88.247 92.718,89.052
NetC219_1: C219.1 J2.6 pad.0@6.833,47.701 R86.2 | length 1.5
  Bottom Layer w0.508: C219.1@6.756,48.24 7.869,48.24 R86.2@8.128,47.981
NetC222_1: C222.1 U22.1 | length 2.6
  Bottom Layer w0.508: C222.1@7.544,71.12 7.569,71.095 U22.1@10.109,71.095
NetC222_2: C222.2 U22.3 | length 2.9
  Bottom Layer w0.508: C222.2@7.544,72.72 8.052,72.72 8.966,73.635 U22.3@10.109,73.635
NetC223_1: C223.1 U22.5 | length 2.6
  Bottom Layer w0.508: C223.1@7.544,76.149 7.569,76.175 U22.5@10.109,76.175
NetC223_2: C223.2 U22.4 | length 2.7
  Bottom Layer w0.508: C223.2@7.544,74.549 8.331,74.549 8.687,74.905 U22.4@10.109,74.905
NetC225_2: C225.2 U22.2 | length 5.4
  Bottom Layer w0.508: U22.2@10.109,72.365 11.582,72.365 12.217,71.73 12.217,70.231 11.379,69.393 C225.2@10.998,69.393
NetC226_2: C226.2 U22.6 | length 2.6
  Bottom Layer w0.508: C226.2@7.544,77.496 7.595,77.445 U22.6@10.109,77.445
NetC227_2: C227.2 C228.2 C229.1 L9.1 R94.1 U23.2 | length 24.4
  Bottom Layer w0.3: U23.2@26.238,23.632 27.315,23.632 27.33,23.647
  Bottom Layer w0.5: 26.01,28.092 26.993,27.109 C228.2@26.993,25.731 ; C228.2@27.018,25.89 27.813,25.095 27.813,23.647 27.33,23.647 ; 27.018,26.314 C227.2@27.018,26.62 ; C229.1@40.594,24.099 C229.1@41.478,24.099
  Bottom Layer w1: 27.813,23.647 28.651,23.647 32.156,27.153 L9.1@33.223,27.153 39.111,27.153 C229.1@41.631,24.633
NetC230_1: C230.1 L9.2 U23.6 U23.7 U23.8 U23.9 U23.10 | length 15.7
  Bottom Layer w0.3: U23.10@26.238,18.432 27.512,18.432 ; U23.9@26.238,19.082 27.512,19.082 ; U23.8@26.238,19.732 27.512,19.732 ; U23.7@26.238,20.382 27.116,20.382 27.127,20.371 27.635,20.371 ; U23.6@26.238,21.032 27.448,21.032 C230.1@27.635,20.846
  Bottom Layer w0.5: C230.1@27.635,20.846 27.635,18.06 28.651,17.043 32.766,17.043 L9.2@33.223,17.501
NetC230_2: C230.2 U23.5 | length 1.5
  Bottom Layer w0.3: U23.5@26.238,21.682 27.405,21.682 C230.2@27.635,21.913
NetC232_2: C232.2 U23.17 | length 1.6
  Bottom Layer w0.3: C232.2@18.212,22.029 18.626,22.029 18.929,22.332 U23.17@19.638,22.332
NetD7_1: D7.1 R29.1 | length 2.2
  Top Layer w0.762: R29.1@3.492,63.627 5.639,63.627 D7.1@5.69,63.678
NetD10_2: D10.2 R40.2 | length 6.3
  Top Layer w0.762: R40.2@12.255,71.755 13.868,71.755 15.443,70.18 D10.2@17.932,70.18
NetD11_1: D11.1 R44.2 | length 5.5
  Top Layer w0.254: D11.1@20.549,72.466 25.616,72.466 R44.2@25.933,72.784
NetD12_1: D12.1 R79.2 | length 2.2
  Top Layer w0.203: D12.1@83.972,10.998 83.972,8.852 R79.2@83.998,8.826
NetD13_1: D13.1 R80.2 | length 2.2
  Top Layer w0.203: D13.1@86.385,10.998 86.385,8.903 R80.2@86.462,8.826
NetD14_1: D14.1 R81.2 | length 2.2
  Top Layer w0.203: D14.1@88.951,10.998 88.951,8.852 R81.2@88.976,8.826
NetD15_1: D15.1 R82.2 | length 2.2
  Top Layer w0.203: D15.1@91.592,10.998 91.592,8.877 R82.2@91.643,8.826
NetD16_1: D16.1 R83.2 | length 2.2
  Top Layer w0.203: R83.2@94.285,8.826 D16.1@94.285,10.998
NetD17_1: D17.1 R84.2 | length 2.2
  Top Layer w0.203: D17.1@97.079,10.998 97.079,8.877 R84.2@97.13,8.826
NetD18_1: D18.1 R85.2 | length 2.2
  Top Layer w0.203: D18.1@99.949,10.998 99.974,10.973 R85.2@99.974,8.826
NetO1_6: O1.6 R11.2 R56.2 | length 11.8
  Top Layer w0.762: R56.2@137.096,83.058 R11.2@137.096,85.166 140.038,85.166 141.745,83.459 144.285,83.459 O1.6@145.543,84.717
NetO2_6: O2.6 R6.1 R62.2 | length 15.5
  Top Layer w0.508: R62.2@136.741,31.166 141.808,31.166 142.164,31.521 ; R6.1@136.766,33.223 140.462,33.223 142.164,31.521 ; O2.6@145.543,32.717 144.347,31.521 142.164,31.521
NetR30_1: R30.1 U4.14 | length 2.1
  Bottom Layer w0.254: R30.1@13.221,57.099 13.221,55.918 13.579,55.559 U4.14@13.967,55.559
NetR34_2: R34.2 U4.44 | length 2.4
  Bottom Layer w0.254: R34.2@19.888,46.342 20.637,47.092 20.637,48.439 U4.44@20.617,48.459
NetR35_1: R35.1 R36.1 U6.1 | length 3.3
  Top Layer w0.762: 10.566,66.446 10.568,66.448 R35.1@10.568,69.785
NetR45_1: R45.1 U7.9 | length 15.5
  Top Layer w0.254: R45.1@37.821,65.9 38.379,66.459 38.379,74.422 39.319,75.362 42.367,75.362 42.835,75.83 U7.9@42.835,77.538
NetR50_2: R50.2 U7.8 | length 11.7
  Top Layer w0.254: v2(42.824,72.873) 42.824,68.398 U7.8@42.835,68.388
  Bottom Layer w0.254: R50.2@35.674,72.847 42.799,72.847 v2(42.824,72.873)
NetR53_2: R53.2 U1.AB3 | length 72.2
  Top Layer w0.254: U1.AB3@51.68,60.589 51.826,60.589 54.432,63.195 54.432,67.386 56.388,69.342 116.319,69.342 R53.2@117.335,68.326
NetR54_2: R54.2 U1.AA2 | length 105.9
  Top Layer w0.203: 53.424,60.089 53.467,60.089 54.856,60.089 54.864,60.096
  Top Layer w0.254: U1.AA2@52.68,59.589 53.18,60.089 53.424,60.089 ; 54.864,60.096 105.588,60.096 106.578,59.106 106.578,18.288 107.696,17.17 R54.2@116.675,17.17
NetR58_2: R58.2 U1.AB4 | length 90.9
  Top Layer w0.254: U1.AB4@50.68,60.589 52.578,62.487 52.578,67.894 55.397,70.714 112.166,70.714 113.487,72.034 113.487,88.214 114.275,89.002 R58.2@117.157,89.002
NetR59_2: R59.2 U1.AB2 | length 88.2
  Top Layer w0.254: U1.AB2@52.68,60.589 53.737,61.646 107.594,61.646 109.347,59.893 109.347,37.77 110.515,36.601 R59.2@117.081,36.601
NetR64_1: R64.1 U1.T6 | length 16
  Top Layer w0.254: v2(41.681,62.967) 41.707,62.992 41.707,64.173 R64.1@41.681,64.198
  Top Layer w0.5: v1(48.214,54.123) U1.T6@48.68,54.589
  Mid-Layer 1 w0.203: v2(41.681,62.967) 43.18,61.468 43.18,55.397 43.51,55.067 47.803,55.067 48.214,54.656 v1(48.214,54.123)
NetR72_1: R72.1 U2.L8 | length 4.8
  Top Layer w0.127: U2.L8@70.065,47.829 70.394,48.158 71.984,48.158 73.126,49.301 R72.1@74.262,49.301
NetR95_2: R95.2 R96.2 U23.18 | length 8.1
  Bottom Layer w0.254: R96.2@19.596,28.473 18.644,27.521 18.644,26.822 21.082,24.384 21.082,23.368 20.696,22.982 U23.18@19.638,22.982
NetS2_3: S2.3 U8.8 | length 3.5
  Top Layer w0.381: U8.8@128.672,60.731 132.131,60.731 S2.3@132.182,60.681
NetS3_3: S3.3 U10.8 | length 4.8
  Top Layer w0.508: U10.8@128.219,8.865 130.2,8.865 130.607,9.271 S3.3@132.893,9.271
NetU8_3: U8.3 U8.4 U8.10 U8.13 | length 15.6
  Top Layer w0.508: U8.4@122.072,64.541 125.298,64.541 ; U8.3@122.072,65.811 125.12,65.811 ; U8.10@128.672,63.271 126.568,63.271 125.298,64.541 ; U8.13@128.672,67.081 126.39,67.081 125.12,65.811 ; 125.12,65.811 125.12,64.719 125.298,64.541
NetU10_3: U10.3 U10.4 U10.10 U10.13 | length 15.4
  Top Layer w0.508: U10.4@121.619,12.675 125.07,12.675 126.34,11.405 U10.10@128.219,11.405 ; U10.3@121.619,13.945 124.968,13.945 ; 124.968,12.776 124.968,13.945 ; U10.13@128.219,15.215 126.238,15.215 124.968,13.945
NetU12_1: U12.1 U12.5 | length 9.1
  Top Layer w0.508: U12.5@121.803,89.726 124.472,89.726 124.943,89.256 124.943,86.589 125.555,85.976 U12.1@127.803,85.976
NetU14_1: U14.1 U14.5 | length 8.7
  Top Layer w0.508: U14.5@121.472,37.148 123.532,37.148 124.46,36.22 124.46,34.29 125.352,33.398 U14.1@127.472,33.398
OPRX1: R58.1 U12.6 | length 3.2
  Top Layer w0.508: R58.1@118.859,89.002 119.385,88.476 U12.6@121.803,88.476
OPRX2: R59.1 U13.1 U14.6 | length 80.5
  Top Layer w0.508: U13.1@69.276,67.669 71.117,67.669 71.755,67.031 71.755,63.779 72.492,63.043 72.517,63.068 110.16,63.068 111.15,62.078 111.15,39.497 112.522,38.125 117.678,38.125 119.906,35.898 U14.6@121.472,35.898
OPRXTAP1: U1.AB7 U13.7 | length 36.4
  Top Layer w0.254: v2(73.025,66.37) 73.073,66.419 U13.7@75.276,66.419
  Top Layer w0.5: U1.AB7@47.68,60.589 v2(48.235,61.143)
  Mid-Layer 2 w0.203: v2(48.235,61.143) v2@48.235,61.239
  Mid-Layer 2 w0.254: v2(48.235,61.143) 48.235,61.798 52.045,65.608 52.045,68.275 55.347,71.577 63.373,71.577 66.497,68.453 68.174,68.453 70.256,66.37 v2(73.025,66.37)
OPRXTAP2: U1.AB5 U13.2 | length 26.6
  Top Layer w0.254: v2(67.335,66.396) 69.253,66.396 U13.2@69.276,66.419
  Top Layer w0.5: U1.AB5@49.68,60.589 v1(50.18,61.089)
  Mid-Layer 2 w0.254: v1(50.18,61.089) 53.848,64.757 53.848,67.716 55.931,69.799 62.052,69.799 65.456,66.396 v2(67.335,66.396)
OPRXTAP3: U1.AB8 U13.6 | length 41.1
  Top Layer w0.254: v2@47.219,61.127 v2(47.219,61.138) ; v2(73.076,65.151) 75.258,65.151 U13.6@75.276,65.169
  Top Layer w0.5: U1.AB8@46.68,60.589 v2@47.219,61.127
  Mid-Layer 2 w0.254: v2(47.219,61.138) 47.219,62.281 51.054,66.116 51.054,68.732 54.839,72.517 64.059,72.517 67.005,69.571 68.91,69.571 70.968,67.513 73.33,67.513 73.939,66.904 73.939,66.015 v2(73.076,65.151)
OPRXTAP4: U1.AB6 U13.3 | length 31
  Top Layer w0.254: v2(67.361,65.176) 67.369,65.169 U13.3@69.276,65.169 U13.3@69.284,65.176
  Top Layer w0.5: U1.AB6@48.68,60.589 v1(49.18,61.089)
  Mid-Layer 2 w0.254: v1(49.18,61.089) 49.18,61.347 52.959,65.126 52.959,67.97 55.601,70.612 62.662,70.612 65.888,67.386 67.615,67.386 68.161,66.84 68.161,65.9 67.437,65.176 v2(67.361,65.176)
OPTX1: R53.1 U8.1 | length 3
  Top Layer w0.508: R53.1@119.037,68.326 119.062,68.351 U8.1@122.072,68.351
OPTX2: R54.1 U10.1 | length 3.5
  Top Layer w0.508: R54.1@118.377,17.17 119.659,17.17 120.345,16.485 U10.1@121.619,16.485
R0: U22.8 X2.4 | length 15.3
  Bottom Layer w0.5: X2.4@3.537,70.261 5.136,70.261 6.299,71.425 6.299,79.265 7.069,80.035 10.109,80.035 U22.8@10.109,79.985
RXD: R89.1 U21.7 U22.9 | length 5.8
  Bottom Layer w0.508: R89.1@15.951,81.585 15.951,80.747 U22.9@16.713,79.985 16.741,79.957 U21.7@20.558,79.957
RXD0: U1.AB12 U21.2 | length 34.6
  Top Layer w0.5: v1(42.18,61.089) U1.AB12@42.68,60.589
  Bottom Layer w0.508: U21.2@26.558,79.957 26.535,79.934 25.07,79.934 24.536,79.4 24.536,75.692 25.502,74.727 28.067,74.727 29.083,73.711 29.083,72.339 33.909,67.513 41.173,67.513 42.545,66.142 42.545,61.454 v1(42.18,61.089)
SCL: R37.2 U4.15 U6.6 | length 13.7
  Top Layer w0.254: v2(14.072,63.627) 18.478,63.627 R37.2@19.672,64.821
  Bottom Layer w0.254: v2(14.072,63.627) 14.072,61.808 14.335,61.544 14.335,56.859 14.617,56.577 U4.15@14.617,56.209
SCL1: R31.2 U1.B2 U20.6 | length 15
  Top Layer w0.203: U1.B2@52.68,40.589 53.201,40.067 53.201,34.569 ; 53.201,34.124 53.201,34.569 ; U20.6@57.21,29.751 54.069,29.751 53.201,30.619 53.201,34.569
SDA: R38.2 U4.16 U6.5 | length 11.6
  Top Layer w0.254: v2(14.672,62.424) 19.434,62.424 R38.2@19.698,62.687
  Bottom Layer w0.254: v2(14.672,62.424) 14.716,62.424 14.716,57.221 15.092,56.845 15.088,56.841 15.088,56.189 U4.16@15.117,56.159
SDA1: R33.2 U1.B1 U20.5 | length 14.9
  Top Layer w0.203: U1.B1@53.68,40.589 54.737,39.532 ; R33.2@56.299,41.046 56.252,41.046 54.737,39.532 ; U20.5@57.21,31.001 54.978,31.001 54.305,31.674 54.305,37.948 54.737,38.379 54.737,39.532
SYS_RST#: R39.2 U1.K20 U5.2 | length 43.3
  Top Layer w0.254: U5.2@8.103,26.797 v2(8.103,31.318)
  Top Layer w0.5: v1(34.18,48.089) U1.K20@34.68,48.589
  Bottom Layer w0.254: v2(8.103,31.318) 8.103,35.255 9.22,36.373 18.161,36.373 20.242,38.454 20.242,42.062 23.392,45.212 30.886,45.212 31.648,45.974 31.648,46.965 32.773,48.089 v1(34.18,48.089)
T0: U22.7 X2.3 | length 19.6
  Bottom Layer w0.508: X2.3@3.537,72.801 4.399,72.801 5.309,73.711 5.309,79.68 6.553,80.924 11.735,80.924 12.421,80.239 12.421,79.197 11.938,78.715 U22.7@10.109,78.715
TEST1: D18.2 U1.D11 | length 80.3
  Top Layer w0.203: v2(44.704,38.151) 45.288,37.567 45.288,25.273 45.695,24.867 68.123,24.867 72.898,20.091 97.739,20.091 99.949,17.882 D18.2@99.949,13.284
  Top Layer w0.5: U1.D11@43.68,42.589 v1(44.18,42.089)
  Mid-Layer 2 w0.203: v1(44.18,42.089) 44.697,41.571 44.697,38.157 v2(44.704,38.151)
TEST2: D14.2 U1.C12 | length 70.3
  Top Layer w0.203: v2(43.167,35.241) 43.459,34.949 43.42,34.909 43.42,23.306 43.866,22.86 65.811,22.86 71.933,16.739 87.859,16.739 88.951,15.646 D14.2@88.951,13.284
  Top Layer w0.5: v1(42.18,41.089) U1.C12@42.68,41.589
  Mid-Layer 2 w0.203: v1(42.18,41.089) 42.401,41.089 43.002,40.488 43.002,35.357 43.129,35.23 43.156,35.23 v2(43.167,35.241)

## Text inside footprints (layer, text, board x,y; h text height)
J4: Top Overlay "2" at 2.997,7.061 h0.8 r90; Top Overlay "1" at 5.537,7.569 h0.8 r90; Top Overlay "9" at 5.537,21.285 h0.8 r90; Top Overlay "10" at 2.997,21.285 h0.8 r90
U2: Top Overlay "*" at 62.052,55.321 h0.8 r270
X3: Top Overlay "*" at 70.899,8.325 h0.8 r180